# Altium PCB PCB Base Meca.PcbDoc
Units mm, origin at the board's own origin, x right, y up, seen from the top; angles counter-clockwise.
Board outline 100 x 110 mm, 2 copper layers (Top Layer, Bottom Layer); 249 components, 165 nets, 730 pads, 0 vias.
Unrouted connection lines stored in the file: 461.
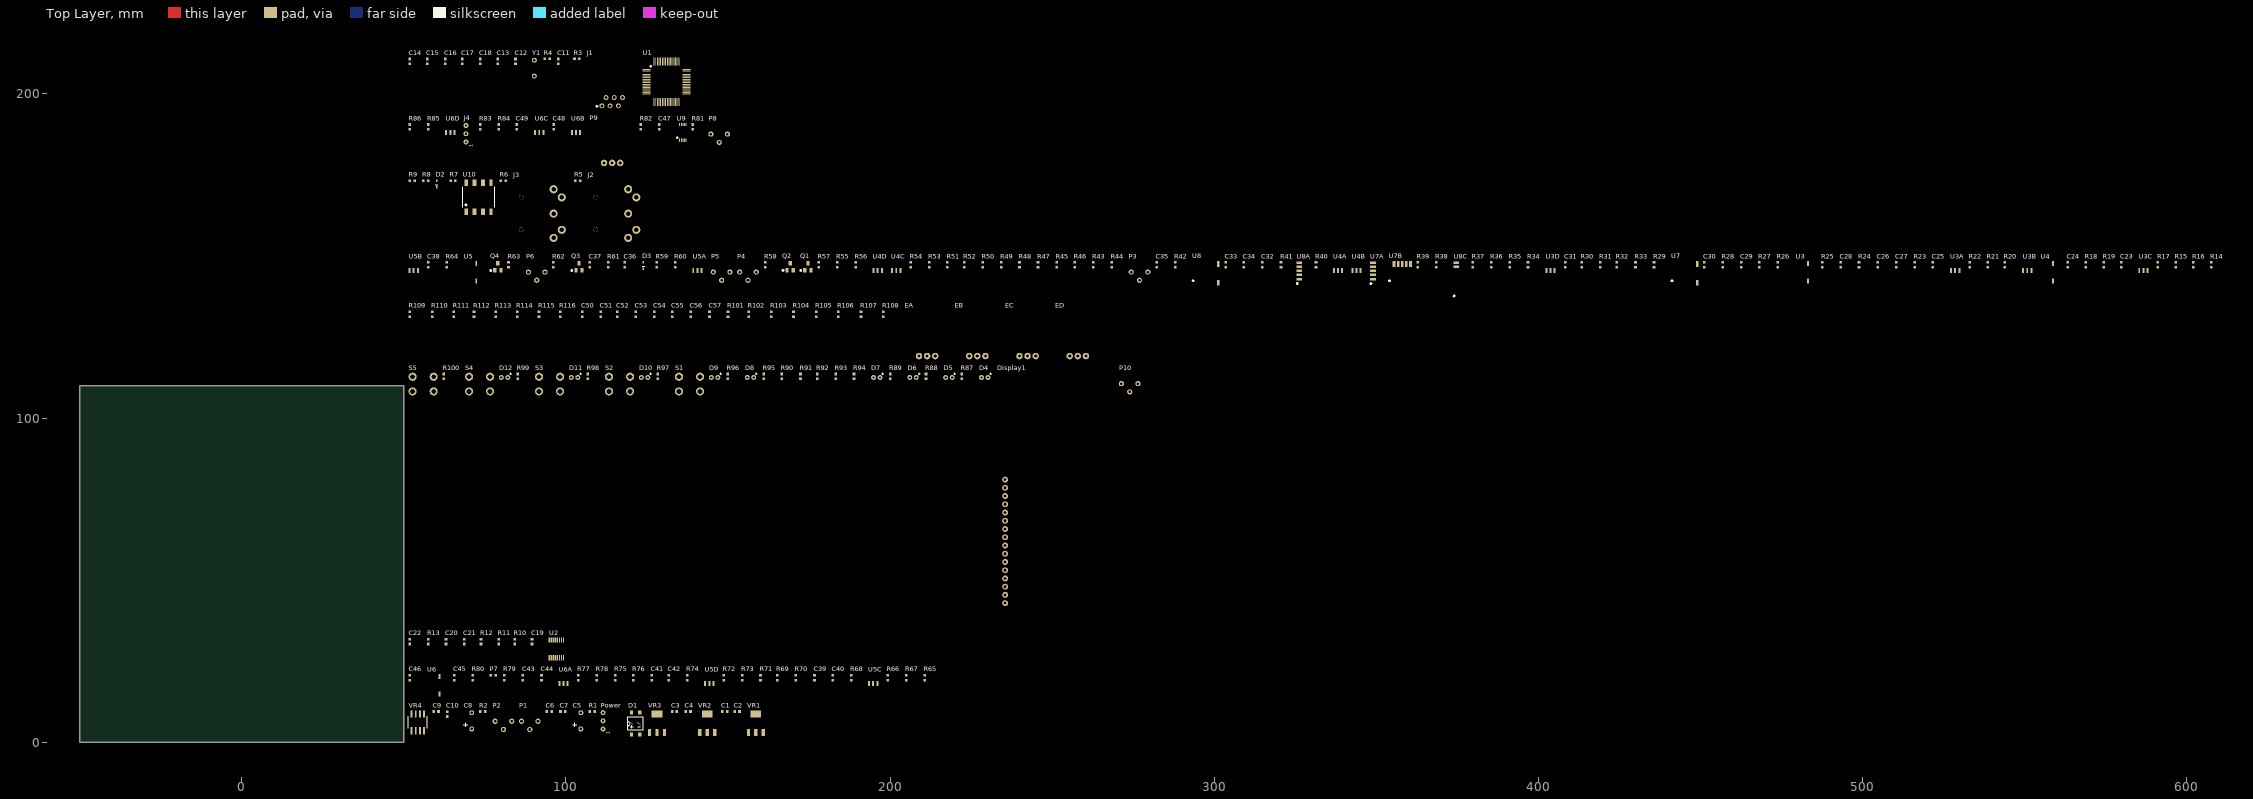
[diagram p0: Top Layer view]
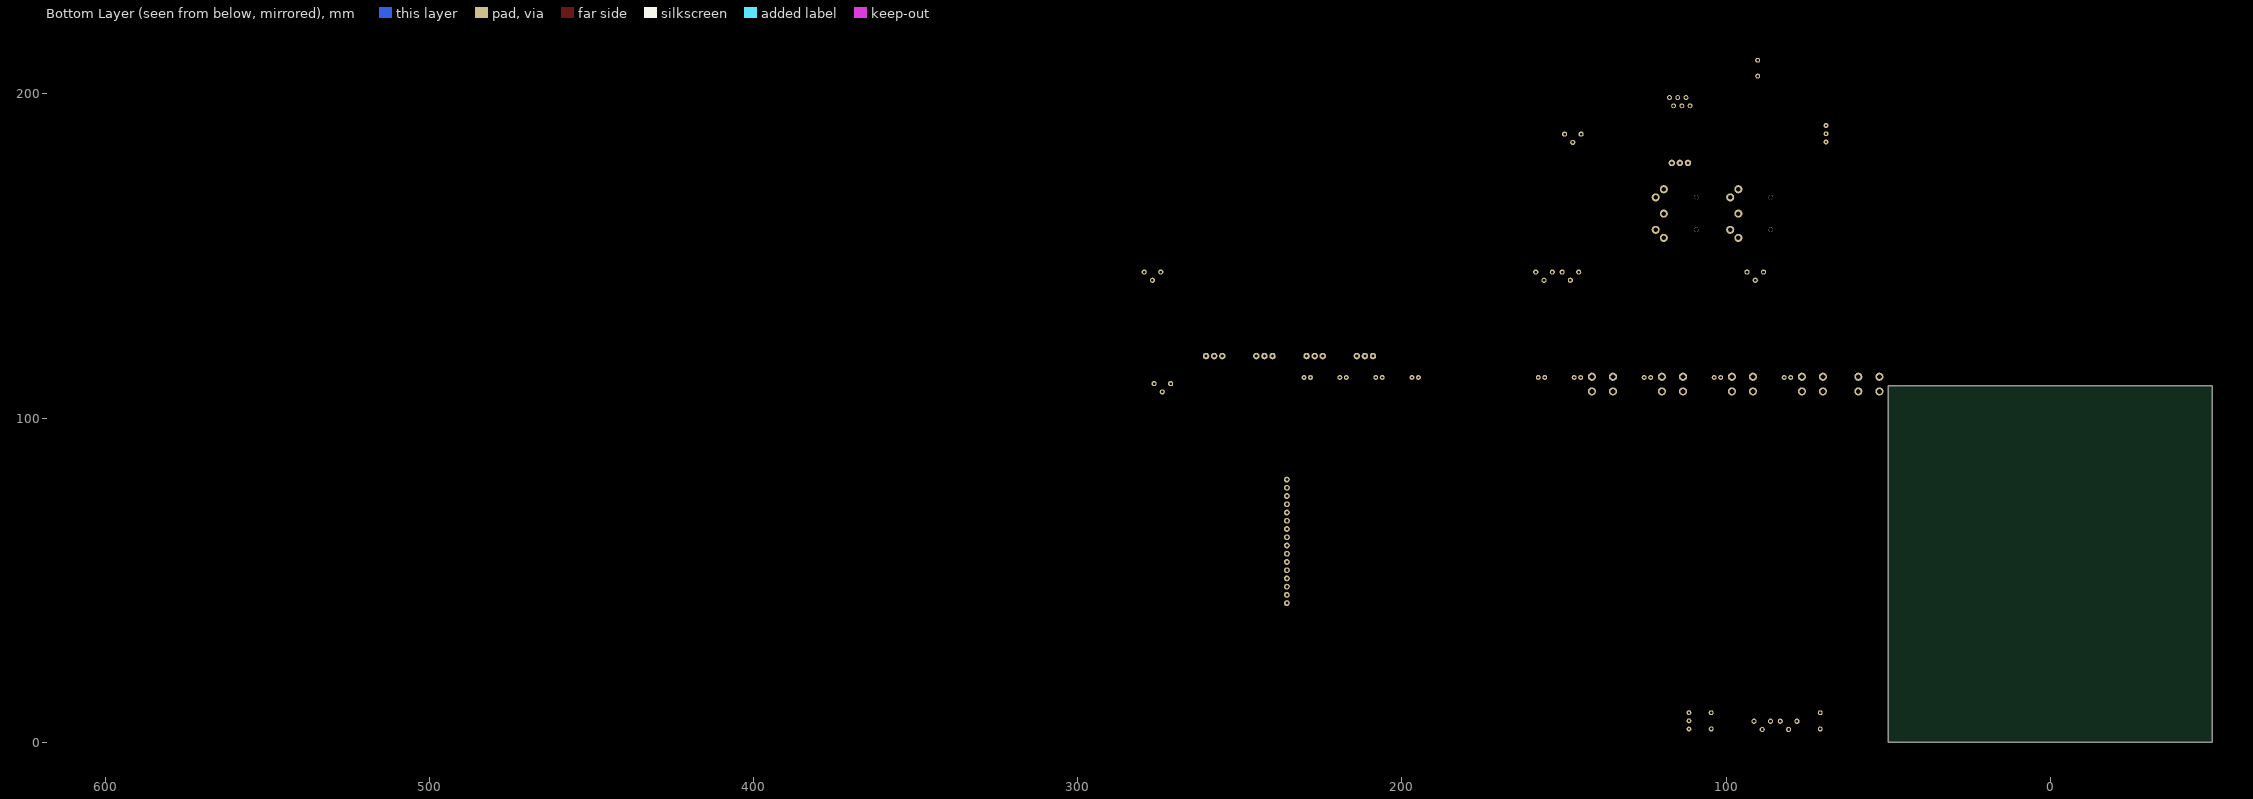
[diagram p1: Bottom Layer view, seen from below]

## Layer stack, top to bottom
Top Solder: solder mask 0.0102, Solder Resist, Dk 3.5
Top Layer: signal copper 0.0356
Dielectric 1: dielectric 0.32, FR-4, Dk 4.8
Bottom Layer: signal copper 0.0356
Bottom Solder: solder mask 0.0102, Solder Resist, Dk 3.5

## Board outline
-50,0 50,0 50,110 -50,110

## Design rules (kind name [scope] priority, off if disabled: settings)
Clearance Clearance_1 [All] p1: gap=0.2
Clearance [All] p2: gap=0.254
MinimumSolderMaskSliver [All] p1: minsoldermaskwidth=0.05
PolygonConnect [All] p1: connectstyle=Relief reliefconductorwidth=0.254 reliefentries=4 polygonreliefangle="90 Angle" airgapwidth=0.254
RoomDefinition PIC [InComponentClass('PIC')] p1: confinementstyle=ConfineIn formatcopy=TRUE lockcomponents=FALSE outline 51.13,194.983 138.633,194.983 138.633,213.906 51.13,213.906
RoomDefinition Multiplexeur [InComponentClass('Multiplexeur')] p2: confinementstyle=ConfineIn formatcopy=TRUE lockcomponents=FALSE outline 51.13,177.584 150.952,177.584 150.952,193.713 51.13,193.713
RoomDefinition "MIDI IN" [InComponentClass('MIDI IN')] p3: confinementstyle=ConfineIn formatcopy=TRUE lockcomponents=FALSE outline 51.13,152.311 124.282,152.311 124.282,176.314 51.13,176.314
RoomDefinition Filtres [InComponentClass('Filtres')] p4: confinementstyle=ConfineIn formatcopy=TRUE lockcomponents=FALSE outline 51.13,137.071 611.327,137.071 611.327,151.168 51.13,151.168
RoomDefinition Encodeurs [InComponentClass('Encodeurs')] p5: confinementstyle=ConfineIn formatcopy=TRUE lockcomponents=FALSE outline 51.13,118.021 265.252,118.021 265.252,135.928 51.13,135.928
RoomDefinition Display [InComponentClass('Display')] p6: confinementstyle=ConfineIn formatcopy=TRUE lockcomponents=FALSE outline 51.13,36.233 277.571,36.233 277.571,116.751 51.13,116.751
RoomDefinition DAC [InComponentClass('DAC')] p7: confinementstyle=ConfineIn formatcopy=TRUE lockcomponents=FALSE outline 51.13,25.057 99.644,25.057 99.644,34.963 51.13,34.963
RoomDefinition "Controle du Filtre" [InComponentClass('Controle du Filtre')] p8: confinementstyle=ConfineIn formatcopy=TRUE lockcomponents=FALSE outline 51.13,13.754 214.833,13.754 214.833,23.787 51.13,23.787
RoomDefinition Alimentation [InComponentClass('Alimentation')] p9: confinementstyle=ConfineIn formatcopy=TRUE lockcomponents=FALSE outline 51.13,1.562 161.62,1.562 161.62,12.611 51.13,12.611
RoutingVias [All] p1: holewidth=0.711 width=1.27 viastyle="Through Hole" minholewidth=0.711 minwidth=1.27 maxholewidth=0.711 maxwidth=1.27
SilkToSilkClearance [All] p1: silktosilkclearance=0.05
SilkToSolderMaskClearance [IsPad] p1: minsilkscreentomaskgap=0.05 clearancetoexposedcopper=TRUE
SolderMaskExpansion [All] p1: expansion=0.102
UnpouredPolygon [All] p1: allowunpoured=FALSE
Width [All] p1: maxlimit=0.254 minlimit=0.254 preferedwidth=0.254
26 further rules are at their usual default settings.

## Classes and differential pairs
component class Alimentation: C1 C2 C3 C4 C5 C6 C7 C8 C9 C10 D1 P1 P2 Power R1 R2 VR1 VR2 VR3 VR4
component class "Controle du Filtre": C39 C40 C41 C42 C43 C44 C45 C46 P7 R65 R66 R67 R68 R69 R70 R71 R72 R73 R74 R75 R76 R77 R78 R79 R80 U5C U5D U6 U6A
component class DAC: C19 C20 C21 C22 R10 R11 R12 R13 U2
component class Display: D4 D5 D6 D7 D8 D9 D10 D11 D12 Display1 P10 R87 R88 R89 R90 R91 R92 R93 R94 R95 R96 R97 R98 R99 R100 S1 S2 S3 S4 S5
component class Encodeurs: C50 C51 C52 C53 C54 C55 C56 C57 EA EB EC ED R101 R102 R103 R104 R105 R106 R107 R108 R109 R110 R111 R112 R113 R114 R115 R116
component class Filtres: C23 C24 C25 C26 C27 C28 C29 C30 C31 C32 C33 C34 C35 C36 C37 C38 D3 P3 P4 P5 P6 Q1 Q2 Q3 Q4 R14 R15 R16 R17 R18 R19 R20 R21 R22 R23 R24 R25 R26 R27 R28 R29 R30 R31 R32 R33 R34 R35 R36 R37 R38 R39 R40 R41 R42 R43 R44 R45 R46 R47 R48 R49 R50 R51 R52 R53 R54 R55 R56 R57 R58 R59 R60 R61 R62 R63 R64 U3 U3A U3B U3C U3D U4 U4A U4B U4C U4D U5 U5A U5B U7 U7A U7B U8 U8A U8C
component class "MIDI IN": D2 J2 J3 R5 R6 R7 R8 R9 U10
component class Multiplexeur: C47 C48 C49 J4 P8 P9 R81 R82 R83 R84 R85 R86 U6B U6C U6D U9
component class PIC: C11 C12 C13 C14 C15 C16 C17 C18 J1 R3 R4 U1 Y1

## Components (designator, comment, footprint, x,y, rotation, side; value= is the part's Value field where it differs from the comment)
C1 "10uF" CAPC1608N 147.396,9.309 r0 top
C2 "100uF" CAPC1608N 151.206,9.309 r0 top
C3 "10uF" CAPC1608N 131.902,9.309 r0 top
C4 "100uF" CAPC1608N 136.093,9.309 r0 top
C5 "2200uF" "Condo electro 13" 104.597,6.642 r90 top
C6 "10uF" CAPC1608N 93.294,9.309 r0 top
C7 "100uF" CAPC1608N 97.485,9.309 r0 top
C8 "2200uF" "Condo electro 13" 70.942,6.642 r90 top
C9 "10uF" CAPC1608N 58.369,9.309 r0 top
C10 "100uF" CAPC1608N 63.576,7.15 r90 top
C11 "20pF" CAPC1608N 97.866,208.445 r90 top
C12 "20pF" CAPC1608N 84.658,208.445 r90 top
C13 "10uF" CAPC1608N 79.197,208.445 r90 top
C14 "0.1uF" CAPC1608N 52.019,208.445 r90 top
C15 "0.1uF" CAPC1608N 57.48,208.445 r90 top
C16 "0.1uF" CAPC1608N 62.941,208.445 r90 top
C17 "0.1uF" CAPC1608N 68.275,208.445 r90 top
C18 "0.1uF" CAPC1608N 73.736,208.445 r90 top
C19 "10uF" CAPC1608N 89.738,29.502 r90 top
C20 "10uF" CAPC1608N 63.195,29.502 r90 top
C21 "10uF" CAPC1608N 68.783,29.502 r90 top
C22 "0.1uF" CAPC1608N 52.019,29.502 r90 top
C23 "0.1uF" CAPC1608N 579.958,145.707 r90 top
C24 "5uF" CAPC1608N 563.448,145.707 r90 top
C25 "0.1uF" CAPC1608N 521.792,145.707 r90 top
C26 "5uF" CAPC1608N 504.774,145.707 r90 top
C27 "5uF" CAPC1608N 510.489,145.707 r90 top
C28 "22pF" CAPC1608N 493.471,145.707 r90 top
C29 "5uF" CAPC1608N 462.737,145.707 r90 top
C30 "5uF" CAPC1608N 451.307,145.707 r90 top
C31 "5uF" CAPC1608N 408.381,145.707 r90 top
C32 "5uF" CAPC1608N 315.036,145.707 r90 top
C33 "220pF" CAPC1608N 303.733,145.707 r90 top
C34 "220pF" CAPC1608N 309.321,145.707 r90 top
C35 "5uF" CAPC1608N 282.397,145.707 r90 top
C36 "100pF" CAPC1608N 118.313,145.707 r90 top
C37 "5uF" CAPC1608N 107.518,145.707 r90 top
C38 "5uF" CAPC1608N 57.734,145.707 r90 top
C39 "10uF" CAPC1608N 176.86,18.326 r90 top
C40 "10uF" CAPC1608N 182.448,18.326 r90 top
C41 "10uF" CAPC1608N 126.695,18.326 r90 top
C42 "10uF" CAPC1608N 131.902,18.326 r90 top
C43 "10uF" CAPC1608N 86.944,18.326 r90 top
C44 "10uF" CAPC1608N 92.659,18.326 r90 top
C45 "5uF" CAPC1608N 65.735,18.326 r90 top
C46 "5uF" CAPC1608N 52.019,18.326 r90 top
C47 "47pF" CAPC1608N 128.981,188.252 r90 top
C48 "4.7uF" CAPC1608N 96.469,188.252 r90 top
C49 "4.7uF" CAPC1608N 85.039,188.252 r90 top
C50 "Cap" CAPC1608N 105.232,130.467 r90 top
C51 "Cap" CAPC1608N 110.947,130.467 r90 top
C52 "Cap" CAPC1608N 116.027,130.467 r90 top
C53 "Cap" CAPC1608N 121.742,130.467 r90 top
C54 "Cap" CAPC1608N 127.457,130.467 r90 top
C55 "Cap" CAPC1608N 133.045,130.467 r90 top
C56 "Cap" CAPC1608N 138.76,130.467 r90 top
C57 "Cap" CAPC1608N 144.475,130.467 r90 top
D1 "MB8S" MB8S 121.488,2.451 r0 top
D2 "1N914" 1N914 61.036,169.837 r0 top
D3 "1N914" 1N914 124.79,144.691 r0 top
D4 "LED0" LED 226.898,111.671 r0 top
D5 "LED1" LED 215.849,111.671 r0 top
D6 "LED2" LED 204.8,111.671 r0 top
D7 "LED3" LED 193.624,111.671 r0 top
D8 "LED4" LED 154.635,111.671 r0 top
D9 "LED5" LED 143.586,111.671 r0 top
D10 "LED6" LED 121.996,111.671 r0 top
D11 "LED7" LED 100.406,111.671 r0 top
D12 "LED8" LED 78.816,111.671 r0 top
Display1 "16x2 LCD" Display 235.661,37.757 r90 top
EA "EC12E" EC12E 211.404,119.164 r0 top
EB "EC12E" EC12E 226.898,119.164 r0 top
EC "EC12E" EC12E 242.392,119.164 r0 top
ED "EC12E" EC12E 257.886,119.164 r0 top
J1 "Program/Debug" RJ11 103.073,193.078 r0 top
J2 "Midi IN" "SOCKET MIDI" 124.282,144.691 r90 top
J3 "Midi THRU" "SOCKET MIDI" 101.295,144.691 r90 top
J4 "Phonejack3" "Header 3" 69.164,187.744 r90 top
P1 "9V ADJ" "BOURNS Trim pot" 88.849,6.515 r0 top
P2 "-9V ADJ" "BOURNS Trim pot" 80.721,6.515 r0 top
P3 "Initial Reso" "BOURNS Trim pot" 276.936,145.072 r0 top
P4 "V/Oct Trim" "BOURNS Trim pot" 156.159,145.072 r0 top
P5 "Initial Freq" "BOURNS Trim pot" 148.031,145.072 r0 top
P6 "Hi compensate" "BOURNS Trim pot" 91.008,145.072 r0 top
P7 "Mod amount" CAPC1608N 76.022,20.485 r0 top
P8 "Output trim" "BOURNS Trim pot" 147.269,187.617 r0 top
P9 "Volume" "ALPS Potentiometer" 113.868,185.204 r0 top
P10 "1K lin" "BOURNS Trim pot" 273.888,110.655 r0 top
Power "12V AC IN" "Header 3" 111.455,6.642 r90 top
Q1 "2N3906" 2N3906 169.367,142.532 r0 top
Q2 "2N3906" 2N3906 163.906,142.532 r0 top
Q3 "2N3904" 2N3906 98.755,142.532 r0 top
Q4 "2N3904" 2N3906 73.736,142.532 r0 top
R1 "120" CAPC1608N 106.502,9.309 r0 top
R2 "240" CAPC1608N 72.72,9.309 r0 top
R3 "10k" CAPC1608N 101.803,210.604 r0 top
R4 "10" CAPC1608N 92.659,210.604 r0 top
R5 "Res1" CAPC1608N 102.057,173.012 r0 top
R6 "Res1" CAPC1608N 79.07,173.012 r0 top
R7 "330" CAPC1608N 63.576,173.012 r0 top
R8 "Res1" CAPC1608N 55.194,173.012 r0 top
R9 "1k" CAPC1608N 51.003,173.012 r0 top
R10 "100" CAPC1608N 84.404,29.502 r90 top
R11 "100" CAPC1608N 79.451,29.502 r90 top
R12 "100" CAPC1608N 73.99,29.502 r90 top
R13 "100" CAPC1608N 57.734,29.502 r90 top
R14 "300k" CAPC1608N 607.644,145.707 r90 top
R15 "2k" CAPC1608N 596.722,145.707 r90 top
R16 "2k" CAPC1608N 602.183,145.707 r90 top
R17 "200k" CAPC1608N 591.261,145.707 r90 top
R18 "100k" CAPC1608N 569.036,145.707 r90 top
R19 "100k" CAPC1608N 574.497,145.707 r90 top
R20 "49.9k" CAPC1608N 544.017,145.707 r90 top
R21 "150k" CAPC1608N 538.81,145.707 r90 top
R22 "4.7M" CAPC1608N 533.222,145.707 r90 top
R23 "2k" CAPC1608N 516.204,145.707 r90 top
R24 "180k" CAPC1608N 499.059,145.707 r90 top
R25 "4.7M" CAPC1608N 487.756,145.707 r90 top
R26 "150k" CAPC1608N 474.04,145.707 r90 top
R27 "39k" CAPC1608N 468.325,145.707 r90 top
R28 "300k" CAPC1608N 457.022,145.707 r90 top
R29 "49.9k" CAPC1608N 435.813,145.707 r90 top
R30 "39k" CAPC1608N 413.588,145.707 r90 top
R31 "100" CAPC1608N 419.176,145.707 r90 top
R32 "100" CAPC1608N 424.383,145.707 r90 top
R33 "43k" CAPC1608N 430.098,145.707 r90 top
R34 "150k" CAPC1608N 396.951,145.707 r90 top
R35 "30k" CAPC1608N 391.363,145.707 r90 top
R36 "100k" CAPC1608N 385.648,145.707 r90 top
R37 "100k" CAPC1608N 379.933,145.707 r90 top
R38 "20k" CAPC1608N 368.63,145.707 r90 top
R39 "20k" CAPC1608N 362.915,145.707 r90 top
R40 "4.7k" CAPC1608N 331.546,145.707 r90 top
R41 "100" CAPC1608N 320.751,145.707 r90 top
R42 "30k" CAPC1608N 288.112,145.707 r90 top
R43 "50k" CAPC1608N 262.839,145.707 r90 top
R44 "50k" CAPC1608N 268.554,145.707 r90 top
R45 "100k" CAPC1608N 251.536,145.707 r90 top
R46 "120k" CAPC1608N 257.124,145.707 r90 top
R47 "30k" CAPC1608N 245.821,145.707 r90 top
R48 "100k" CAPC1608N 240.106,145.707 r90 top
R49 "100k" CAPC1608N 234.518,145.707 r90 top
R50 "100k" CAPC1608N 228.803,145.707 r90 top
R51 "7.5k" CAPC1608N 217.881,145.707 r90 top
R52 "7.5k" CAPC1608N 223.088,145.707 r90 top
R53 "2k" CAPC1608N 212.293,145.707 r90 top
R54 "100k" CAPC1608N 206.578,145.707 r90 top
R55 "100k" CAPC1608N 183.845,145.707 r90 top
R56 "30k" CAPC1608N 189.56,145.707 r90 top
R57 "1M" CAPC1608N 178.13,145.707 r90 top
R58 "100k" CAPC1608N 161.62,145.707 r90 top
R59 "33k" CAPC1608N 128.219,145.707 r90 top
R60 "33k" CAPC1608N 133.934,145.707 r90 top
R61 "10k" CAPC1608N 113.233,145.707 r90 top
R62 "100k" CAPC1608N 96.342,145.707 r90 top
R63 "475" CAPC1608N 82.499,145.707 r90 top
R64 "10k" CAPC1608N 63.449,145.707 r90 top
R65 "18K" CAPC1608N 210.896,18.326 r90 top
R66 "2k" CAPC1608N 199.466,18.326 r90 top
R67 "2k" CAPC1608N 205.181,18.326 r90 top
R68 "3.3k" CAPC1608N 188.163,18.326 r90 top
R69 "10k" CAPC1608N 165.43,18.326 r90 top
R70 "10k" CAPC1608N 171.145,18.326 r90 top
R71 "18K" CAPC1608N 160.223,18.326 r90 top
R72 "2k" CAPC1608N 148.92,18.326 r90 top
R73 "2k" CAPC1608N 154.635,18.326 r90 top
R74 "3.3k" CAPC1608N 137.617,18.326 r90 top
R75 "10k" CAPC1608N 115.392,18.326 r90 top
R76 "10k" CAPC1608N 120.98,18.326 r90 top
R77 "2k" CAPC1608N 103.962,18.326 r90 top
R78 "2k" CAPC1608N 109.677,18.326 r90 top
R79 "10k" CAPC1608N 81.229,18.326 r90 top
R80 "10k" CAPC1608N 71.45,18.326 r90 top
R81 "50k" CAPC1608N 139.268,188.252 r90 top
R82 "10k" CAPC1608N 123.266,188.252 r90 top
R83 "330" CAPC1608N 73.736,188.252 r90 top
R84 "5k" CAPC1608N 79.451,188.252 r90 top
R85 "10k" CAPC1608N 57.734,188.252 r90 top
R86 "10k" CAPC1608N 52.019,188.252 r90 top
R87 "220" CAPC1608N 222.326,111.29 r90 top
R88 "220" CAPC1608N 211.277,111.29 r90 top
R89 "220" CAPC1608N 200.228,111.29 r90 top
R90 "10K" CAPC1608N 166.827,111.29 r90 top
R91 "10K" CAPC1608N 172.542,111.29 r90 top
R92 "10K" CAPC1608N 177.749,111.29 r90 top
R93 "10K" CAPC1608N 183.464,111.29 r90 top
R94 "10K" CAPC1608N 189.052,111.29 r90 top
R95 "220" CAPC1608N 161.239,111.29 r90 top
R96 "220" CAPC1608N 150.063,111.29 r90 top
R97 "220" CAPC1608N 128.473,111.29 r90 top
R98 "220" CAPC1608N 106.883,111.29 r90 top
R99 "220" CAPC1608N 85.293,111.29 r90 top
R100 "220" CAPC1608N 62.56,111.29 r90 top
R101 "10K" CAPC1608N 150.19,130.467 r90 top
R102 "10K" CAPC1608N 156.54,130.467 r90 top
R103 "10K" CAPC1608N 163.525,130.467 r90 top
R104 "10K" CAPC1608N 170.383,130.467 r90 top
R105 "10K" CAPC1608N 177.368,130.467 r90 top
R106 "10K" CAPC1608N 184.226,130.467 r90 top
R107 "10K" CAPC1608N 191.211,130.467 r90 top
R108 "10K" CAPC1608N 198.069,130.467 r90 top
R109 "330" CAPC1608N 52.019,130.467 r90 top
R110 "330" CAPC1608N 59.004,130.467 r90 top
R111 "330" CAPC1608N 65.608,130.467 r90 top
R112 "330" CAPC1608N 71.831,130.467 r90 top
R113 "330" CAPC1608N 78.562,130.467 r90 top
R114 "330" CAPC1608N 85.166,130.467 r90 top
R115 "330" CAPC1608N 91.897,130.467 r90 top
R116 "330" CAPC1608N 98.501,130.467 r90 top
S1 "BUT0" "PUSH BUTTON" 138.125,110.528 r0 top
S2 "BUT1" "PUSH BUTTON" 116.535,110.528 r0 top
S3 "BUT2" "PUSH BUTTON" 94.945,110.528 r0 top
S4 "BUT3" "PUSH BUTTON" 73.355,110.528 r0 top
S5 "BUT4" "PUSH BUTTON" 55.956,110.528 r0 top
U1 "PIC32MX575F512H" PIC32 125.298,209.461 r0 top
U2 "PCM1781" PCM1781 97.485,30.137 r0 top
U3 "TL084" "TL084 - Alim" 483.057,144.945 r0 top
U3A "TL084" "TL084 - 3pads" 528.523,148.247 r0 top
U3B "TL084" "TL084 - 3pads" 550.748,148.247 r0 top
U3C "TL084" "TL084 - 3pads" 586.562,148.247 r0 top
U3D "TL084" "TL084 - 3pads" 403.682,148.247 r0 top
U4 "TL084" "TL084 - Alim" 558.749,144.945 r0 top
U4A "TL084" "TL084 - 3pads" 338.15,148.247 r0 top
U4B "TL084" "TL084 - 3pads" 343.865,148.247 r0 top
U4C "TL084" "TL084 - 3pads" 201.879,148.247 r0 top
U4D "TL084" "TL084 - 3pads" 196.164,148.247 r0 top
U5 "TL084" "TL084 - Alim" 72.339,144.945 r0 top
U5A "TL084" "TL084 - 3pads" 140.538,148.247 r0 top
U5B "TL084" "TL084 - 3pads" 53.035,148.247 r0 top
U5C "TL084" "TL084 - 3pads" 194.767,20.866 r0 top
U5D "TL084" "TL084 - 3pads" 144.221,20.866 r0 top
U6 "TL084" "TL084 - Alim" 61.036,17.564 r0 top
U6A "TL084" "TL084 - 3pads" 99.263,20.866 r0 top
U6B "TL084" "TL084 - 3pads" 103.073,190.792 r0 top
U6C "TL084" "TL084 - 3pads" 91.77,190.792 r0 top
U6D "TL084" "TL084 - 3pads" 64.338,190.792 r0 top
U7 "LM13700" "LM13700 - Alim" 441.147,142.405 r0 top
U7A "LM13700" "LM13700 - A" 348.31,141.516 r90 top
U7B "LM13700" "LM13700 - B" 354.025,142.405 r0 top
U8 "LM13700" "LM13700 - Alim" 293.446,142.405 r0 top
U8A "LM13700" "LM13700 - A" 325.577,141.516 r90 top
U8C "LM13700" "LM13700 - C" 373.964,137.706 r90 top
U9 "ADG704" ADG704 133.426,184.061 r0 top
U10 "6N139" 6N139 68.148,162.217 r0 top
VR1 "LM1117-3.3" LM1117-SOT 158.572,8.801 r0 top
VR2 "LM1117-5.0" LM1117-SOT 143.586,8.801 r0 top
VR3 "LM1117-ADJ" LM1117-SOT 128.092,8.801 r0 top
VR4 "LM337L" LM337L 53.67,8.801 r0 top
Y1 "12.288 MHz" Xtal 90.246,205.524 r90 top

## Footprints (in the part's own frame and the unit in brackets; to place one, negate y for a bottom-side part, rotate by r counter-clockwise, add the part's x,y. Pads: shape width x height; smd on the part's side, far side on the other; paste and mask are expansions set on the pad)
1N914 [mm] "Diode"
  rect 0.5x0.8 smd: 1(-0.889,3.396) 2(-0.889,1.396)
  silkscreen extent -1.27,2.16 -0.51,2.16
2N3906 [mm]
  rect 1x1.4 smd: 1(6.218,3.048) 2(4.318,3.048) 3(5.268,5.248)
  silkscreen extent 2.85,2.85 3.25,3.25
6N139 [mil] "Optocoupleur"
  rect 40x78.74 smd: 1(45,60) 4(345,60) 5(345,409.13) 8(45,409.13)
  rect 50x78.74 smd: 2(145,60) 3(245,60) 6(245,409.13) 7(145,409.13)
  silkscreen extent 0,110 390,360
ADG704 [mm] "Multiplexeur"
  rect 0.3x1 smd mask+0.05: 1(1.651,1.651) 2(2.151,1.651) 3(2.659,1.651) 4(3.159,1.651) 5(3.675,1.651) 6(3.675,6.498) 7(3.159,6.498) 8(2.659,6.498) 9(2.151,6.498) 10(1.651,6.498)
  silkscreen extent 0.69,2.21 1.09,2.61
"ALPS Potentiometer" [mm] "Encodeur"
  round 0 hole 3 mask+0: 0(-5.207,0.531) 0(6.005,0.531)
  round 2 hole 1 mask+0: 1(2.877,-6.469) 2(-2.123,-6.469) 3(0.377,-6.469)
"BOURNS Trim pot" [mm]
  round 1.6 hole 0.8: 1(-2.57,0) 2(2.54,0) 3(0,-2.54)
CAPC1608N [mm]
  rect 0.8x0.8 smd: 1(0.838,0.203) 2(2.337,0.203)
"Condo electro 13" [mil]
  round 60 hole 30: 1(-98.43,0) 2(98.43,0)
  silkscreen extent -73,50 -23,100
Display [mm]
  round 0 hole 2.7 mask+0: 0(0,0) 0(0,-30.607) 0(74.549,-30.607) 0(74.549,0)
  round 1.8 hole 1: 1(5.2,0.193) 2(7.74,0.193) 3(10.28,0.193) 4(12.82,0.193) 5(15.36,0.193) 6(17.9,0.193) 7(20.44,0.193) 8(22.98,0.193) 9(25.52,0.193) 10(28.06,0.193) 11(30.6,0.193) 12(33.14,0.193) 13(35.68,0.193) 14(38.22,0.193) 15(40.76,0.193) 16(43.3,0.193)
EC12E [mm] "Encodeur"
  round 0 hole 3 mask+0: 0(-5.584,7.5) 0(5.628,7.493)
  round 2 hole 1 mask+0: 1(2.5,0) 2(-2.5,0) 3(0,0)
"Header 3" [mm]
  round 1.5 hole 0.7: 1(-2.54,0) 2(0,0) 3(2.54,0)
LED [mm]
  round 1.5 hole 0.7: 1(3.27,0.889) 2(1.27,0.889)
  silkscreen extent 3.81,1.71 4.44,2.35
LM337L [mm]
  rect 0.6x2.2 smd mask+0.1: 1(-1.27,-5.2) 2(0,-5.2) 3(1.27,-5.2) 4(2.54,-5.2) 5(2.54,0) 6(1.27,0) 7(0,0) 8(-1.27,0)
  round 0.4 on Top Overlay: ""(-1.524,-3.549)
  silkscreen extent -2.29,-4.44 3.56,-0.75
LM1117-SOT [mm]
  rect 1x2.15 smd: 1(-2.3,-5.8) 2(0,-5.8) 3(2.3,-5.8)
  rect 3.25x2.15 smd: 4(0,0)
"LM13700 - A" [mm]
  rect 0.8x1.8 smd: 1(1.397,-0.635) 2(2.667,-0.635) 3(3.937,-0.635) 4(5.207,-0.635) 5(6.477,-0.635)
  silkscreen extent -0.2,-0.2 0.2,0.2
"LM13700 - Alim" [mm]
  rect 0.8x1.8 smd: 1(7.747,5.165) 2(7.747,-0.635)
  silkscreen extent -0.2,-0.2 0.2,0.2
"LM13700 - B" [mm]
  rect 0.8x1.8 smd: 1(1.397,5.165) 2(2.667,5.165) 3(3.937,5.165) 4(5.207,5.165) 5(6.477,5.165)
  silkscreen extent -0.2,-0.2 0.2,0.2
"LM13700 - C" [mm]
  rect 0.8x1.8 smd: 1(9.017,-0.635) 2(10.287,-0.635)
  silkscreen extent -0.2,-0.2 0.2,0.2
MB8S [mm]
  rect 1x1.2 smd: 1(-1.25,6.8) 2(1.25,6.8) 3(1.25,0) 4(-1.25,0)
  silkscreen extent -2.35,1.4 2.35,5.4
PCM1781 [mm] "DAC"
  rect 0.4x1.6 smd mask+0.05: 1(-2.667,-4.003) 2(-2.032,-4.003) 3(-1.397,-4.003) 4(-0.762,-4.003) 5(-0.127,-4.003) 6(0.508,-4.003) 7(1.143,-4.003) 8(1.778,-4.003) 9(1.778,1.397) 10(1.143,1.397) 11(0.508,1.397) 12(-0.127,1.397) 13(-0.762,1.397) 14(-1.397,1.397) 15(-2.032,1.397) 16(-2.667,1.397)
  round 0.4 on Top Overlay: 1(-2.54,-2.54)
PIC32 [mm] "PIC32MX575F512H"
  rect 2.5x0.3 smd paste+0 mask+0.05: 1(-0.5,-1.905) 2(-0.5,-2.405) 3(-0.5,-2.913) 4(-0.5,-3.413) 5(-0.5,-3.929) 6(-0.5,-4.429) 7(-0.5,-4.945) 8(-0.5,-5.445) 9(-0.5,-5.961) 10(-0.5,-6.461) 11(-0.5,-6.969) 12(-0.5,-7.469) 13(-0.5,-7.985) 14(-0.5,-8.485) 15(-0.5,-9.001) 16(-0.5,-9.501) 33(11.9,-9.501) 34(11.9,-9.001) 35(11.9,-8.485) 36(11.9,-7.985) 37(11.9,-7.469) 38(11.9,-6.969) 39(11.9,-6.461) 40(11.9,-5.961) 41(11.9,-5.445) 42(11.9,-4.945) 43(11.9,-4.429) 44(11.9,-3.929) 45(11.9,-3.413) 46(11.9,-2.913) 47(11.9,-2.405) 48(11.9,-1.905)
  rect 0.3x2.5 smd paste+0 mask+0.05: 17(1.905,-11.9) 18(2.405,-11.9) 19(2.913,-11.9) 20(3.413,-11.9) 21(3.929,-11.9) 22(4.429,-11.9) 23(4.945,-11.9) 24(5.445,-11.9) 25(5.961,-11.9) 26(6.461,-11.9) 27(6.969,-11.9) 28(7.469,-11.9) 29(7.985,-11.9) 30(8.485,-11.9) 31(9.001,-11.9) 32(9.501,-11.9) 49(9.501,0.5) 50(9.001,0.5) 51(8.485,0.5) 52(7.985,0.5) 53(7.469,0.5) 54(6.969,0.5) 55(6.461,0.5) 56(5.961,0.5) 57(5.445,0.5) 58(4.945,0.5) 59(4.429,0.5) 60(3.929,0.5) 61(3.413,0.5) 62(2.913,0.5) 63(2.405,0.5) 64(1.905,0.5)
  silkscreen extent 0.69,-1.09 1.09,-0.69
"PUSH BUTTON" [mm]
  round 2.5 hole 1.5: 1(3.25,2.25) 2(-3.25,2.25) 3(-3.25,-2.25) 4(3.25,-2.25)
RJ11 [mm] "RJ11 Socket"
  round 0 hole 3.25 mask+0: 0(6.11,12.159) 0(16.27,12.159)
  round 1.5 hole 0.9: 1(8.025,3.269) 2(9.295,5.809) 3(10.565,3.269) 4(11.835,5.809) 5(13.105,3.269) 6(14.375,5.809)
  silkscreen extent 6.28,2.91 6.68,3.31
"SOCKET MIDI" [mm] "Midi"
  round 1.4 hole 1.5 mask+0: 0(13.415,15.08) 0(23.415,15.08)
  round 2.5 hole 1.4: 1(18.415,5.08) 2(10.922,5.08) 3(25.922,5.08) 4(13.415,2.58) 5(23.415,2.58)
"TL084 - 3pads" [mm] "Ampli-op"
  round 0.4 on Mech1: 0(0,0.033)
  rect 0.6x1.55 smd: 1(-1.27,-2.667) 2(0,-2.667) 3(1.27,-2.667)
"TL084 - Alim" [mm] "Ampli-op"
  round 0.4 on Top Overlay: 0(-3.81,-1.27)
  round 0.4 on Mech1: 0(-2.54,0) 0(2.54,0)
  rect 0.6x1.55 smd: 1(0,2.7) 2(0,-2.7)
Xtal [mil]
  round 60 hole 30: 1(0,0) 2(192.13,0)

## Part data
C1 C2 C3 C4 C6 C7 C9 C10: library part Cap2, "Capacitor"
C5 C8 C19 C20 C21: library part "Cap Pol1", "Polarized Capacitor (Radial)"
C11 C12 C14 C15 C16 C17 C18 C22 C23 C24 C25 C26 C27 C28 C29 C30 C31 C32 C33 C34 C35 C36 C37 C38 C39 C40 C41 C42 C43 C44 C45 C46 C47 C48 C49: library part "Cap Semi", "Capacitor (Semiconductor SIM Model)"
C13: library part Cap, "Capacitor"
C50 C51 C52 C53 C54 C55 C56 C57: "Capacitor"
D1: library part Bridge1, "Full Wave Diode Bridge"
D2: library part Diode, "Default Diode"
D3: library part "Diode 1N4001", "1 Amp General Purpose Rectifier"
D4: "Typical INFRARED GaAs LED"
D5 D6 D7 D8 D9 D10 D11 D12: library part LED0, "Typical INFRARED GaAs LED"
Display1: library part Display
J1: library part "Header 6H", "Header, 6-Pin, Right Angle"
J2 J3: library part "Header 5", "DIN 5 Pins"
J4: "Jack Socket, 1/4\" [6.5mm], Thru-Hole, Vertical, 3-Conductor Open Circuit (Non-Normalling)"
P1 P2 P3 P4 P5 P6 P8 P9 P10: library part RPot, "Potentiometer"
P7: library part "Res Adj1", "Variable Resistor"
Power: library part "Header 3", "Header, 3-Pin"
Q1 Q2: "PNP General Purpose Amplifier"
Q3 Q4: "NPN General Purpose Amplifier"
R1 R2 R10 R11 R12 R13 R14 R15 R16 R17 R18 R19 R20 R21 R22 R23 R24 R25 R26 R27 R28 R29 R30 R31 R32 R33 R34 R35 R36 R37 R38 R39 R40 R41 R42 R43 R44 R45 R46 R47 R48 R49 R50 R51 R52 R53 R54 R55 R56 R57 R58 R59 R60 R61 R62 R63 R64 R65 R66 R67 R68 R69 R70 R71 R72 R73 R74 R75 R76 R77 R78 R79 R80 R81 R82 R83 R84 R85 R86: library part Res3, "Resistor"
R3 R4 R7 R9 R87 R88 R89 R90 R91 R92 R93 R94 R95 R96 R97 R98 R99 R100 R101 R102 R103 R104 R105 R106 R107 R108 R109 R110 R111 R112 R113 R114 R115 R116: library part Res1, "Resistor"
R5 R6 R8: "Resistor"
S1 S2 S3 S4 S5: library part SW-PB, "Switch"
U1: library part "PIC32 MX575F512H"
U2: library part "PCM1781 DAC"
U3 U4 U5 U6: library part TL_CLEAN
U7A U7B U8A: library part LM13700_2
U8C: library part LM13700_1
U10: library part Optocoupleur
VR1 VR2 VR3 VR4: library part "Volt Reg", "Voltage Regulator"
Y1: library part XTAL, "Crystal Oscillator"

## Nets (pads, with @x,y where several pads share a name; then routed paths per layer and width w, separated by ;. In a path a pad name is that pad's centre, name@x,y a point inside that pad or via, vN(x,y) a via of type N, cw(c..) or ccw(c..) an arc to the next point about the centre after c; other vN are vias at no path point)
3,3V: C14.2 C15.2 C16.2 C17.2 C18.2 J1.2 R3.2 R4.1 R4.2 U1.10 U1.19 U1.26 U1.38 U1.57
+3.3V: C2.1 R90.2 R91.2 R92.2 R93.2 R94.2 VR1.3
+5V: C4.1 C21.1 C22.2 Display1.2 Display1.16 P10.2 R5.2 R7.2 U2.11 U9.5 U9.6 U10.8 VR2.3
+9V: C7.1 C24.1 C26.1 C30.1 C32.1 C37.1 C45.1 R1.2 R38.1 R39.1 R44.2 R57.1 R60.2 U3.2 U4.2 U5.2 U6.2 U7.1 U8.1 VR3.3
-9V: C10.2 C27.2 C29.2 C31.2 C35.2 C38.2 C46.2 R2.1 R30.2 R33.2 R40.1 R43.1 R55.1 R59.1 R65.1 R71.1 U3.1 U4.1 U5.1 U6.1 U7.2 U8.2 VR4.3
GND: C1.2 C2.2 C3.2 C4.2 C5.2 C6.2 C7.2 C8.1 C9.1 C10.1 C11.1 C12.1 C13.1 C14.1 C15.1 C16.1 C17.1 C18.1 C24.2 C26.2 C27.1 C29.1 C30.2 C31.1 C32.2 C33.1 C34.1 C35.1 C37.2 C38.1 C39.1 C40.1 C41.1 C42.1 C43.1 C44.1 C45.2 C46.1 C50.1 C51.1 C52.1 C53.1 C54.1 C55.1 C56.1 C57.1 D4.2 D5.2 D6.2 D7.2 D8.2 D9.2 D10.2 D11.2 D12.2 Display1.1 Display1.5 EA.3 EB.3 EC.3 ED.3 J1.3 J3.2 J4.3 P1.1 P1.3 P2.2 P2.3 P9.1 Power.2 Q1.1 Q2.1 Q3.2 R9.1 R22.2 R24.2 R25.2 R27.2 R31.2 R32.2 R41.2 R42.2 R56.2 R63.2 R69.2 R75.2 R80.2 R86.2 S1.2 S2.2 S3.2 S4.2 S5.2 U1.9 U1.20 U1.25 U1.41 U3B.2 U3D.3 U4C.3 U5A.3 U5B.3 U6B.2 U6C.2 U7A.3 U7B.3 U8A.3 U9.3 U10.5 VR1.2 VR2.2
NetC1_1: C1.1 C3.1 C5.1 C6.1 D1.4 VR1.1 VR2.1 VR3.1
NetC8_2: C8.2 C9.2 D1.3 VR4.1
NetC11_2: C11.2 U1.40 Y1.2
NetC12_2: C12.2 U1.39 Y1.1
NetC13_2: C13.2 U1.56
NetC19_1: C19.1 U2.15
NetC19_2: C19.2 R17.1 U9.2
NetC20_1: C20.1 U2.13
NetC23_1: C23.1 R19.2 R36.2 U4B.1 U4B.2
NetC23_2: C23.2 R22.1 U3C.3
NetC25_1: C25.1 R20.2 R37.1 U4A.1 U4A.2
NetC25_2: C25.2 R25.1 U3A.3
NetC28_1: C28.1 R21.1 R24.1 U3C.2
NetC28_2: C28.2 R16.1 R21.2 R29.2 U3C.1
NetC33_2: C33.2 U4A.3 U7A.5
NetC34_2: C34.2 U4B.3 U7B.5
NetC36_1: C36.1 Q4.3 R57.2 U5B.2
NetC36_2: C36.2 P6.2 P6.3 R64.1 U5B.1
NetC39_2: C39.2 R66.2 R67.1
NetC40_2: C40.2 R67.2 R68.1
NetC41_2: C41.2 R72.2 R73.1
NetC42_2: C42.2 R73.2 R74.1
NetC43_2: C43.2 R77.2 R78.1
NetC44_2: C44.2 R78.2 U6A.3
NetC47_1: C47.1 C48.2 P8.1 U6B.3
NetC47_2: C47.2 R83.2 U6B.1
NetC48_1: C48.1 P9.3
NetC49_1: C49.1 R81.1 R83.1
NetC49_2: C49.2 R84.1 U6D.3
NetC50_2: C50.2 EA.2 R101.2 R109.2
NetC51_2: C51.2 EA.1 R102.1 R110.2
NetC52_2: C52.2 EB.2 R103.2 R111.2
NetC53_2: C53.2 EB.1 R104.1 R112.2
NetC54_2: C54.2 EC.2 R105.2 R113.2
NetC55_2: C55.2 EC.1 R106.1 R114.2
NetC56_2: C56.2 ED.2 R107.2 R115.2
NetC57_2: C57.2 ED.1 R108.1 R116.2
NetD1_1: D1.1 Power.1
NetD1_2: D1.2 Power.3
NetD2_1: D2.1 J2.5 U10.3
NetD2_2: D2.2 R6.2 U10.2
NetD3_1: D3.1 P4.3 Q4.2
NetD3_2: D3.2 R61.2
NetD4_1: D4.1 R87.2
NetD5_1: D5.1 R88.2
NetD6_1: D6.1 R89.2
NetD7_1: D7.1 R95.2
NetD8_1: D8.1 R96.2
NetD9_1: D9.1 R97.2
NetD10_1: D10.1 R98.2
NetD11_1: D11.1 R99.2
NetD12_1: D12.1 R100.2
NetDisplay1_3: Display1.3 P10.3
NetDisplay1_4: Display1.4 U1.30
NetDisplay1_6: Display1.6 U1.31
NetDisplay1_7: Display1.7 U1.23
NetDisplay1_8: Display1.8 U1.24
NetDisplay1_9: Display1.9 U1.27
NetDisplay1_10: Display1.10 U1.28
NetDisplay1_15: Display1.15 P10.1
NetJ1_1: J1.1 R3.1 U1.7
NetJ1_4: J1.4 U1.18
NetJ1_5: J1.5 U1.17
NetJ2_4: J2.4 R6.1
NetJ3_4: J3.4 R5.1
NetJ3_5: J3.5 R8.1
NetJ4_1: J4.1 R82.2 U6C.1
NetJ4_2: J4.2 R85.1 U6D.1
NetP1_2: P1.2 R1.1 VR3.2
NetP2_1: P2.1 R2.2 VR4.2
NetP3_1: P3.1 R44.1
NetP3_2: P3.2 R43.2
NetP3_3: P3.3 R45.1
NetP4_1: P4.1 R53.2 U5A.1
NetP4_2: P4.2 R63.1
NetP5_1: P5.1 R60.1
NetP5_2: P5.2 R59.2
NetP5_3: P5.3 R62.1
NetP6_1: P6.1 R61.1
NetP7_1: P7.1 R80.1
NetP7_2: P7.2 R79.2 U6A.2
NetP8_2: P8.2 P8.3 R81.2
NetP9_2: P9.2 U9.8
NetQ1_2: Q1.2 Q2.2 Q3.3
NetQ1_3: Q1.3 R51.1
NetQ2_3: Q2.3 R52.1
NetQ3_1: Q3.1 Q4.1 R64.2
NetR7_1: R7.1 R8.2 U1.21 U10.6
NetR9_2: R9.2 U10.7
NetR10_1: R10.1 U1.51
NetR10_2: R10.2 U2.5
NetR11_1: R11.1 U1.32
NetR11_2: R11.2 U2.6
NetR12_1: R12.1 U1.29
NetR12_2: R12.2 U2.7
NetR13_1: R13.1 U1.52
NetR13_2: R13.2 U2.8
NetR14_1: R14.1 R17.2 R20.1 U3B.3
NetR14_2: R14.2 R15.1 R18.1 U3B.1
NetR15_2: R15.2 U9.9
NetR16_2: R16.2 U9.7
NetR18_2: R18.2 R19.1 R32.1 R33.1 R34.1 U7B.4
NetR23_1: R23.1 R26.2 U3A.1
NetR23_2: R23.2 U9.4
NetR26_1: R26.1 R27.1 U3A.2
NetR28_1: R28.1 R29.1 U3D.2
NetR28_2: R28.2 R35.1 U3D.1
NetR30_1: R30.1 R31.1 R36.1 R37.2 U7A.4
NetR34_2: R34.2 R40.2 U8C.2
NetR35_2: R35.2 R41.1 U8A.4
NetR38_2: R38.2 U7B.2
NetR39_2: R39.2 U7A.2
NetR42_1: R42.1 U8A.5 U8C.1
NetR45_2: R45.2 R46.1 R49.2 U4C.2
NetR46_2: R46.2 R50.1 U4C.1
NetR47_1: R47.1 U8A.1
NetR47_2: R47.2 R48.2 U4D.1
NetR48_1: R48.1 R50.2 U4D.2
NetR49_1: R49.1 R76.1 U5D.1
NetR51_2: R51.2 U7A.1
NetR52_2: R52.2 U7B.1
NetR53_1: R53.1 R54.2 R58.2 R62.2 U5A.2
NetR54_1: R54.1 R79.1 U6A.1
NetR55_2: R55.2 R56.1 U4D.3
NetR58_1: R58.1 R70.1 U5C.1
NetR65_2: R65.2 R68.2 U5C.3
NetR66_1: R66.1 U1.46
NetR69_1: R69.1 R70.2 U5C.2
NetR71_2: R71.2 R74.2 U5D.3
NetR72_1: R72.1 U1.49
NetR75_1: R75.1 R76.2 U5D.2
NetR77_1: R77.1 U1.50
NetR82_1: R82.1 R84.2 U6C.3
NetR85_2: R85.2 R86.1 U6D.2
NetR87_1: R87.1 U1.53
NetR88_1: R88.1 U1.54
NetR89_1: R89.1 U1.55
NetR90_1: R90.1 S5.1 U1.15
NetR91_1: R91.1 S4.1 U1.6
NetR92_1: R92.1 S3.1 U1.1
NetR93_1: R93.1 S2.1 U1.60
NetR94_1: R94.1 S1.1 U1.59
NetR95_1: R95.1 U1.58
NetR96_1: R96.1 U1.2
NetR97_1: R97.1 U1.3
NetR98_1: R98.1 U1.4
NetR99_1: R99.1 U1.5
NetR100_1: R100.1 U1.16
NetR109_1: R109.1 U1.61
NetR110_1: R110.1 U1.62
NetR111_1: R111.1 U1.63
NetR112_1: R112.1 U1.64
NetR113_1: R113.1 U1.11
NetR114_1: R114.1 U1.12
NetR115_1: R115.1 U1.13
NetR116_1: R116.1 U1.14
NetU1_47: U1.47 U9.10
NetU1_48: U1.48 U9.1
VCC: R101.1 R102.2 R103.1 R104.2 R105.1 R106.2 R107.1 R108.2
pads on no net: C20.2 C21.2 C22.1 Display1.0 Display1.11 Display1.12 Display1.13 Display1.14 EA.0 EB.0 EC.0 ED.0 J1.0 J1.6 J2.0 J2.1 J2.2 J2.3 J3.0 J3.1 J3.3 P9.0 S1.3 S1.4 S2.3 S2.4 S3.3 S3.4 S4.3 S4.4 S5.3 S5.4 U1.8 U1.22 U1.33 U1.34 U1.35 U1.36 U1.37 U1.42 U1.43 U1.44 U1.45 U2.1 U2.2 U2.3 U2.4 U2.9 U2.10 U2.12 U2.14 U2.16 U3.0 U3A.0 U3B.0 U3C.0 U3D.0 U4.0 U4A.0 U4B.0 U4C.0 U4D.0 U5.0 U5A.0 U5B.0 U5C.0 U5D.0 U6.0 U6A.0 U6B.0 U6C.0 U6D.0 U8A.2 U10.1 U10.4 VR1.4 VR2.4 VR3.4 VR4. VR4.4 VR4.5 VR4.6 VR4.7 VR4.8

## Text inside footprints (layer, text, board x,y; h text height)
D1: Top Overlay "~" at 121.327,5.762 h1.52 r330; Top Overlay "~" at 119.138,5.753 h1.52 r330
J4: Top Overlay "1" at 71.196,183.553 h1 r90
Power: Top Overlay "1" at 113.487,2.451 h1 r90